# Altium PCB CSMSCMP.PcbDoc
Units mm, origin at the board's own origin, x right, y up, seen from the top; angles counter-clockwise.
Board outline 60 x 100 mm, 2 copper layers (Top Layer, Bottom Layer); 23 components, 14 nets, 71 pads, 590 vias.
Unrouted connection lines stored in the file: 6.
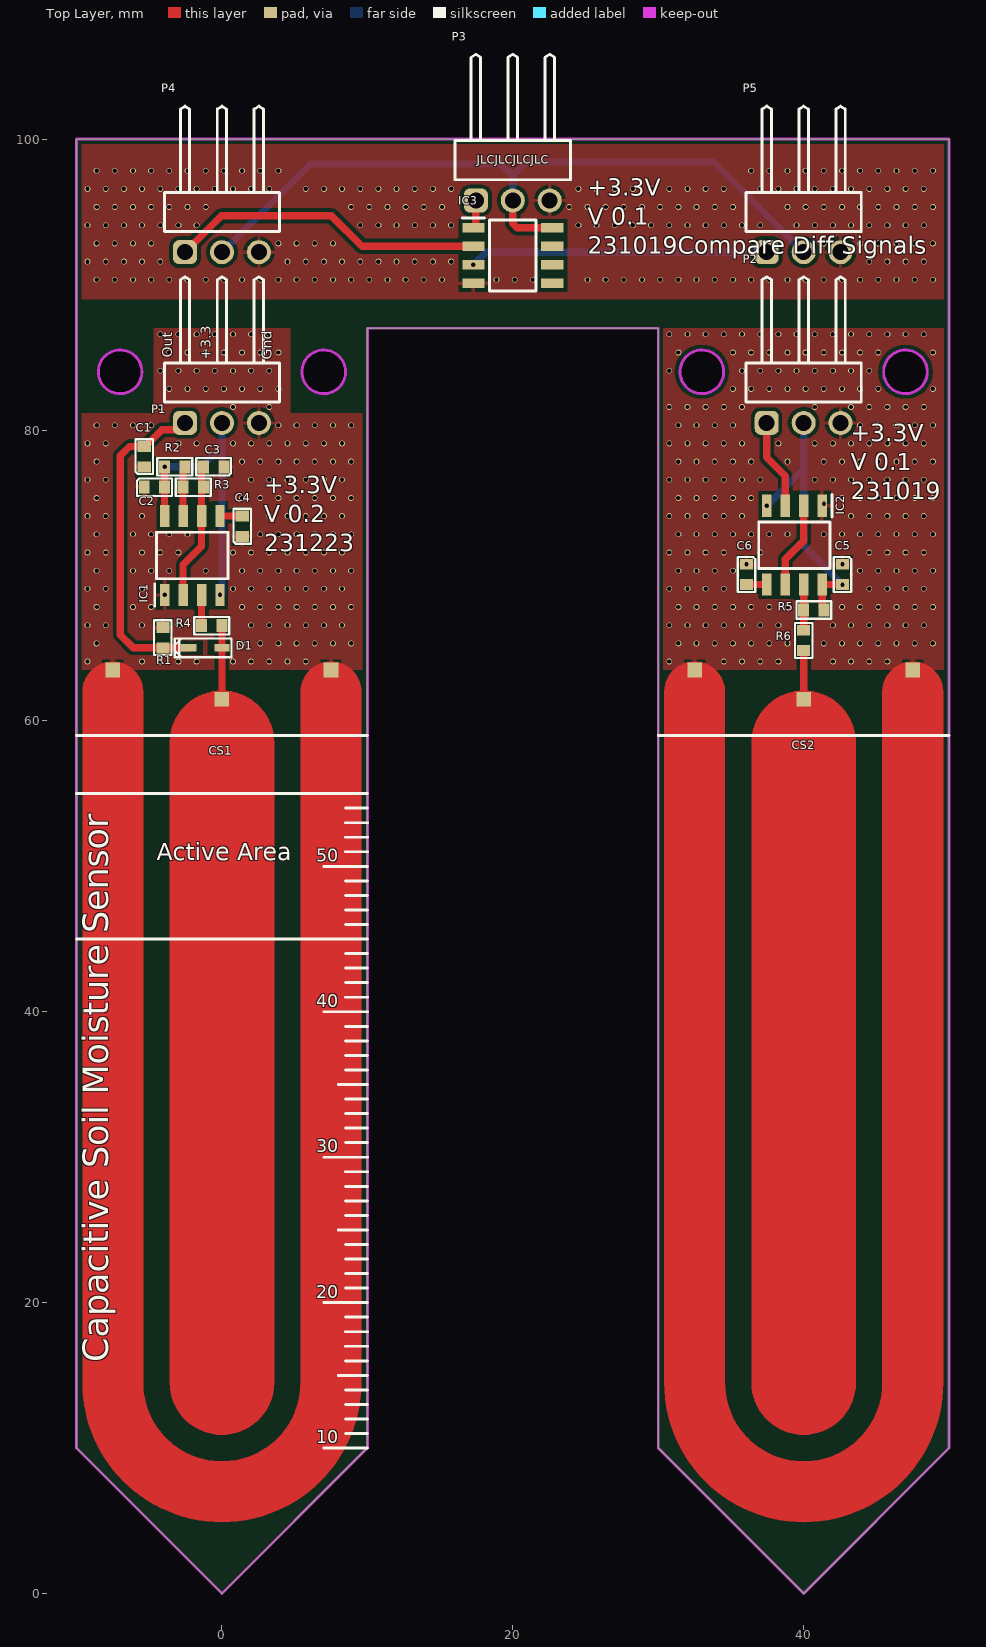
[diagram p0: Top Layer view]
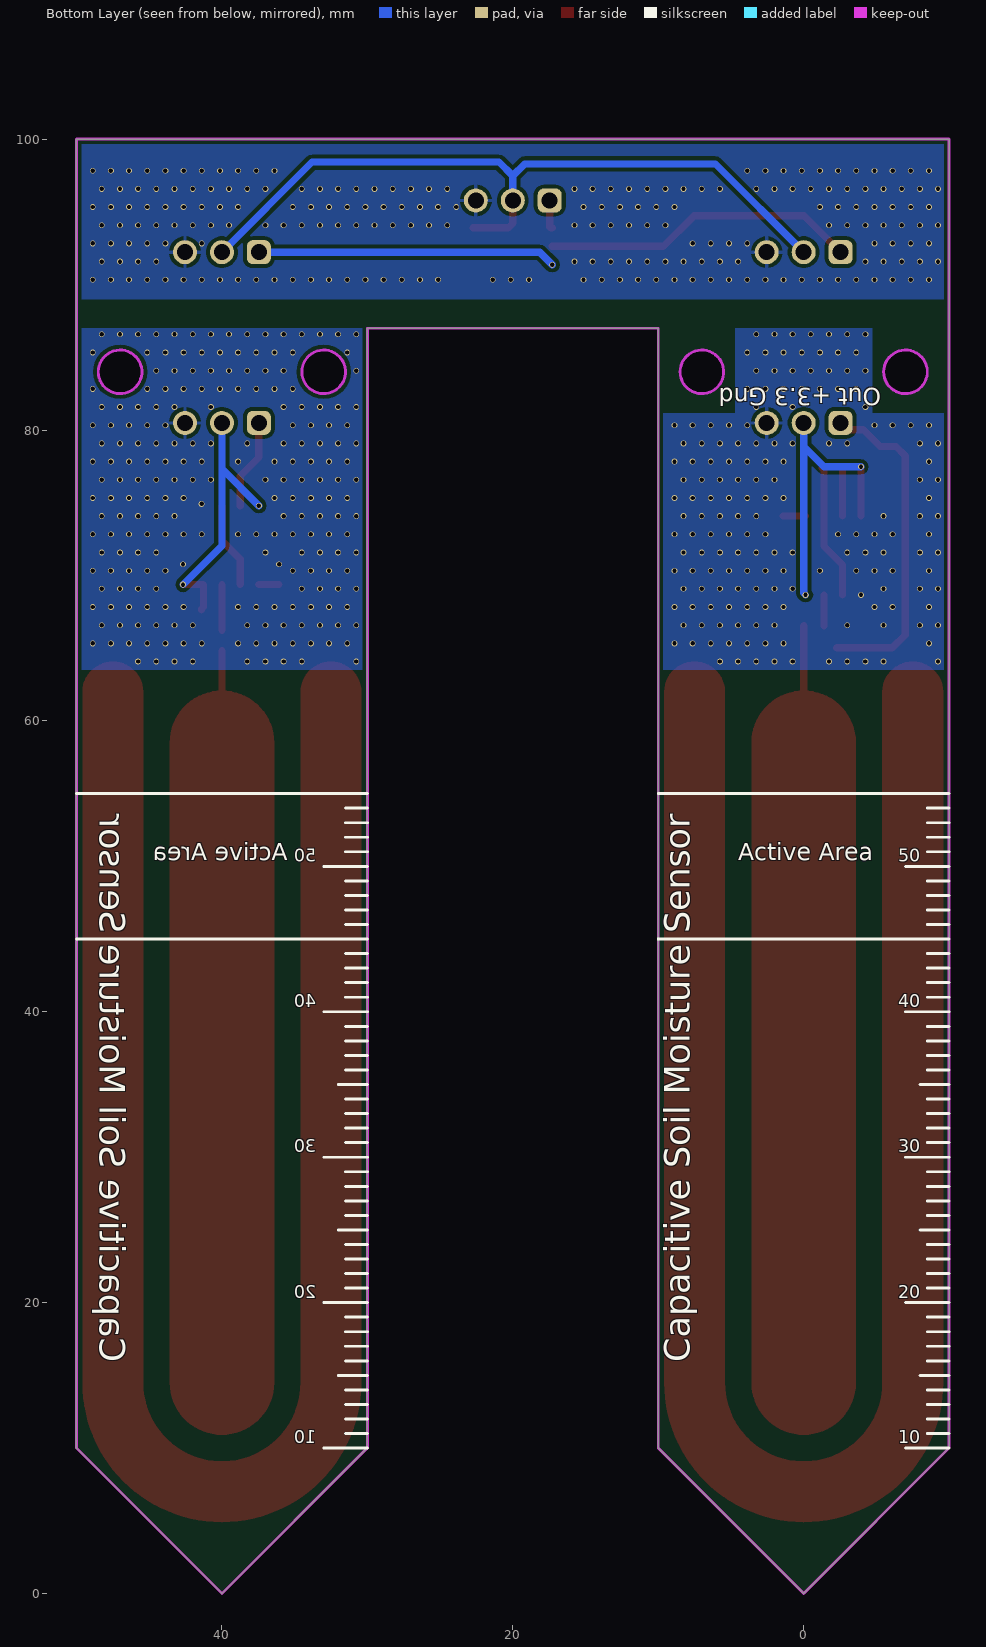
[diagram p1: Bottom Layer view, seen from below]
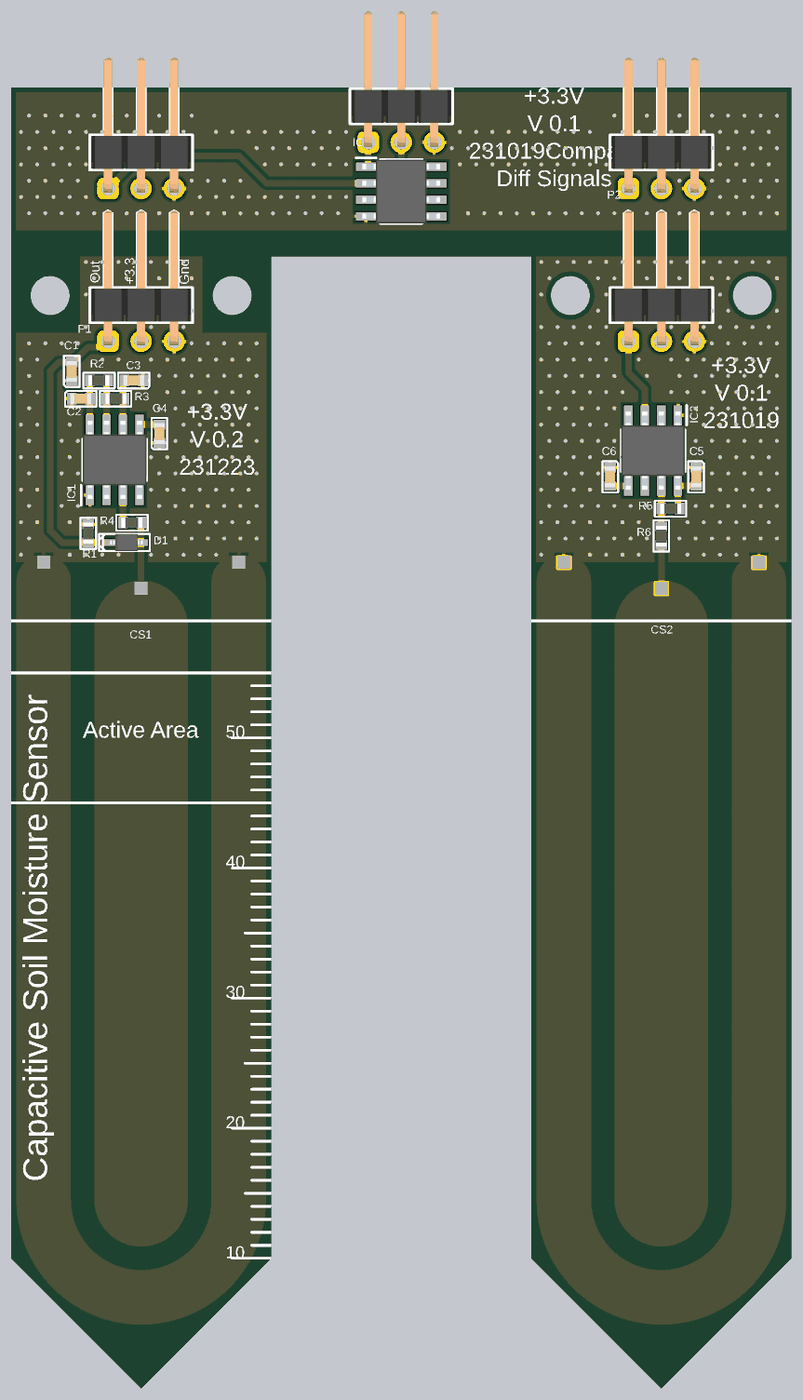
[diagram p2: 3D render of the assembled board from above, using the file's embedded part models]

## Layer stack, top to bottom
Top Solder: solder mask 0.0102, Solder Resist, Dk 3.5
Top Layer: signal copper 0.0356
Dielectric 1: dielectric 0.32, FR-4, Dk 4.8
Bottom Layer: signal copper 0.0356
Bottom Solder: solder mask 0.0102, Solder Resist, Dk 3.5

## Board outline
0,0 -10,10 -10,100 50,100 50,10 40,0 30,10 30,87 10,87 10,10
cut-out: 47,82.5 cw(c47,84) 45.5,84 cw(c47,84) 47,85.5 cw(c47,84) 48.5,84 cw(c47,84)
cut-out: 33,82.5 cw(c33,84) 31.5,84 cw(c33,84) 33,85.5 cw(c33,84) 34.5,84 cw(c33,84)
cut-out: 7,82.5 cw(c7,84) 5.5,84 cw(c7,84) 7,85.5 cw(c7,84) 8.5,84 cw(c7,84)
cut-out: -7,82.5 cw(c-7,84) -8.5,84 cw(c-7,84) -7,85.5 cw(c-7,84) -5.5,84 cw(c-7,84)

## Design rules (kind name [scope] priority, off if disabled: settings)
Clearance [All] p1: gap=0.254 ignorepadtopadclearanceinfootprint=FALSE except(0: Arc-Hole Track-Hole SMDPad-Hole THPad-Hole Via-Hole Fill-Hole Poly-Hole Region-Hole Text-Hole)
PolygonConnect [All] p1: thpad.connectstyle=Relief thpad.reliefconductorwidth=0.254 thpad.reliefentries=4 thpad.polygonreliefangle="90 Angle" thpad.airgapwidth=0.254 smdpad.connectstyle=Relief smdpad.reliefconductorwidth=0.254 smdpad.reliefentries=4 smdpad.polygonreliefangle="90 Angle" smdpad.airgapwidth=0.254 via.connectstyle=Direct via.reliefconductorwidth=0.254 via.reliefentries=4 via.polygonreliefangle="90 Angle" via.airgapwidth=0.254
RoutingVias [All] p1: holewidth=0.3 width=0.4 viastyle="Through Hole" minholewidth=0.3 minwidth=0.4 maxholewidth=0.711 maxwidth=1.27
SolderMaskExpansion [All] p1: expansion=0.102 istentingtop=FALSE
UnRoutedNet [All] p1: checkbadconnections=TRUE
Width [All] p1: maxlimit=1 minlimit=0.254 preferedwidth=0.3 minimp=50.000000 maximp=50.000000 favimp=50.000000
29 further rules are at their usual default settings.

## Classes and differential pairs
component class CSMSF: C5 C6 CS2 IC2 P2 R5 R6
component class CMP: IC3 P3 P4 P5
component class CSMS: C1 C2 C3 C4 CS1 D1 IC1 P1 R1 R2 R3 R4

## Components (designator, comment, footprint, x,y, rotation, side; value= is the part's Value field where it differs from the comment)
C1 "CL10B105KA8NNNC" "0603 CAP" -5.34,78.17 r90 top value="1uF 25VDC"
C2 "CL10B104KB8NNNC" "0603 CAP" -4.64,76.073 r0 top value="100nF 50VDC"
C3 "CL10B471KB8NNNC" "0603 CAP" -0.57,77.47 r180 top value="470pF 50VDC"
C4 "CC0603KRX7R9BB103" "0603 CAP" 1.397,73.386 r90 top value="10nF 50VDC"
C5 "CL10B104KB8NNNC" "0603 CAP" 42.672,70.071 r270 top value="100nF 50VDC"
C6 "CC0603KRX7R9BB103" "0603 CAP" 36.068,70.071 r270 top value="10nF 50VDC"
CS1 "Sens" SENS 0,34.5 r0 top
CS2 "Sens" Sens 40,34.5 r0 top
D1 "1N4148WS-E3-08" SOD2513X110N -1.138,65.024 r0 top
IC1 "TLC555CDR" SOIC127P600X175-8N -2.035,71.374 r90 top
IC2 "TLC555CDR" SOIC127P600X175-8N 39.365,72.083 r270 top
IC3 "LM393DG" SOIC127P600X175-8N 20,92 r0 top
P1 "61300311021" 61300311021 0,83.26 r180 top
P2 "61300311021" 61300311021 40,83.26 r180 top
P3 "61300311021" 61300311021 20,98.552 r180 top
P4 "61300311021" 61300311021 0,95 r180 top
P5 "61300311021" 61300311021 40,95 r180 top
R1 "0603SAF1004T5E" "0603 RES" -4.064,65.724 r90 top value="1M %1"
R2 "0603SAF3300T5E" "0603 RES" -3.24,77.47 r180 top value="330R %1"
R3 "0603SAF1601T5E" "0603 RES" -1.97,76.073 r0 top value="1.6K %1"
R4 "0603SAF1002T5E" "0603 RES" -0.7,66.548 r180 top value="10K %1"
R5 "0603SAF1002T5E" "0603 RES" 40.7,67.622 r0 top value="10K %1"
R6 "0603SAF1004T5E" "0603 RES" 40,65.532 r270 top value="1M %1"

## Footprints (in the part's own frame and the unit in brackets; to place one, negate y for a bottom-side part, rotate by r counter-clockwise, add the part's x,y. Pads: shape width x height; smd on the part's side, far side on the other; paste and mask are expansions set on the pad)
"0603 CAP" [mm]
  rect 0.75x0.9 smd: 1(-0.7,0) 2(0.7,0)
  silkscreen extent -1.2,-0.6 1.2,0.6, body extent -0.8,-0.4 0.8,0.4, height 0.8
"0603 RES" [mm]
  rect 0.75x0.9 smd: 1(-0.7,0) 2(0.7,0)
  silkscreen extent -1.2,-0.6 1.2,0.6, body extent -0.77,-0.4 0.83,0.4, height 0.45
61300311021 [mm] "Pin Header, pitch 2.54 mm, THT, Angled, single row, 3p"
  rrect50% 1.65x1.65 hole 1.1: 1(2.54,2.77)
  round 1.65 hole 1.1: 2(0,2.77) 3(-2.54,2.77)
  silkscreen extent -3.96,-7.27 3.96,1.35, body extent -3.81,-7.27 3.81,3.09, height 2.58
SENS [mm]
  rect 1x1 smd mask+0.102: 1(0,27) 2(-7.5,29) 2(7.5,29)
  Top Layer region: -3.5,-20 -3.153,-21.519 -2.182,-22.736 -0.779,-23.412 0.779,-23.412 2.182,-22.736 3.153,-21.519 3.5,-20 3.5,-20 3.5,24 3.153,25.519 2.182,26.736 0.779,27.412 -0.779,27.412 -2.182,26.736 -3.153,25.519 -3.5,24 -3.5,24
  Top Layer region: -9.5,-20 -9.5,27.5 -9.302,28.368 -8.747,29.064 -7.945,29.45 -7.055,29.45 -6.253,29.064 -5.698,28.368 -5.5,27.5 -5.5,27.5 -5.5,-20 -4.955,-22.386 -3.429,-24.3 -1.224,-25.362 1.224,-25.362 3.429,-24.3 4.955,-22.386 5.5,-20 5.5,-20 5.5,27.5 5.698,28.368 6.253,29.064 7.055,29.45 7.945,29.45 8.747,29.064 9.302,28.368 9.5,27.5 9.5,27.5 9.5,-20 8.559,-24.122 5.923,-27.427 2.114,-29.262 -2.114,-29.262 -5.923,-27.427 -8.559,-24.122 -9.5,-20
  Top Layer lines w0.2: -9.5,-20 ccw(c0,-20) 9.5,-20 9.5,27.5 ccw(c7.5,27.5) 5.5,27.5 5.5,-20 cw(c0,-20) -5.5,-20 -5.5,27.5 ccw(c-7.5,27.5) -9.5,27.5 -9.5,-20 ; -3.5,-20 ccw(c0,-20) 3.5,-20 3.5,24 ccw(c0,24) 0,27.5 ccw(c0,24) -3.5,24 -3.5,-20
Sens [mm]
  rect 1x1 smd: 1(0,27) 2(-7.5,29) 2(7.5,29)
  Top Layer region: -3.5,-20 -3.153,-21.519 -2.182,-22.736 -0.779,-23.412 0.779,-23.412 2.182,-22.736 3.153,-21.519 3.5,-20 3.5,-20 3.5,24 3.153,25.519 2.182,26.736 0.779,27.412 -0.779,27.412 -2.182,26.736 -3.153,25.519 -3.5,24 -3.5,24
  Top Layer region: -9.5,-20 -9.5,27.5 -9.302,28.368 -8.747,29.064 -7.945,29.45 -7.055,29.45 -6.253,29.064 -5.698,28.368 -5.5,27.5 -5.5,27.5 -5.5,-20 -4.955,-22.386 -3.429,-24.3 -1.224,-25.362 1.224,-25.362 3.429,-24.3 4.955,-22.386 5.5,-20 5.5,-20 5.5,27.5 5.698,28.368 6.253,29.064 7.055,29.45 7.945,29.45 8.747,29.064 9.302,28.368 9.5,27.5 9.5,27.5 9.5,-20 8.559,-24.122 5.923,-27.427 2.114,-29.262 -2.114,-29.262 -5.923,-27.427 -8.559,-24.122 -9.5,-20
  Top Layer lines w0.2: -9.5,-20 ccw(c0,-20) 9.5,-20 9.5,27.5 ccw(c7.5,27.5) 5.5,27.5 5.5,-20 cw(c0,-20) -5.5,-20 -5.5,27.5 ccw(c-7.5,27.5) -9.5,27.5 -9.5,-20 ; -3.5,-20 ccw(c0,-20) 3.5,-20 3.5,24 ccw(c0,24) 0,27.5 ccw(c0,24) -3.5,24 -3.5,-20
SOD2513X110N [mm]
  rect 1.05x0.5 smd: 1(-1.138,0) 2(1.138,0)
  silkscreen extent -2.1,-0.65 1.8,0.65, body extent -1.25,-0.65 1.25,0.65, height 1.1
SOIC127P600X175-8N [mm]
  rect 1.525x0.65 smd: 1(-2.712,1.905) 2(-2.712,0.635) 3(-2.712,-0.635) 4(-2.712,-1.905) 5(2.712,-1.905) 6(2.712,-0.635) 7(2.712,0.635) 8(2.712,1.905)
  silkscreen extent -3.47,-2.45 1.6,2.58, body extent -3,-2.45 3,2.45, height 1.75

## Part data
C1: "1uF 25VDC ±10% X7R MLCC 0603", Ozdisan Price/Stock=https://ozdisan.com/Product/Detail/522144/CL10A106MO8NQNC, Supplier 1=Ozdisan, Supplier 2=Digi-Key, Supplier Part Number 1=CL10B105KA8NNNC, Supplier Part Number 2=1276-1184-1-ND
C2 C5: "100nF 50VDC ±10% X7R MLCC 0603", Ozdisan Price/Stock=https://ozdisan.com/Product/Detail/522144/CL10A106MO8NQNC, Supplier 1="Arrow Electronics", Supplier Part Number 1=CL10B104KB8NNNC
C3: "470pF 50VDC ±10% X7R MLCC 0603", Supplier Part Number 1=187-CL10B471KB8NNNC, Ozdisan Price/Stock=https://ozdisan.com/Product/Detail/522144/CL10A106MO8NQNC, Supplier 1=Mouser
C4 C6: "10nF, 50 V, ± 10%, X7R, 0603, Multilayer Ceramic Capacitor,", Supplier Part Number 1=311-1085-1-ND, Ozdisan Price/Stock=https://ozdisan.com/Product/Detail/522144/CL10A106MO8NQNC, Supplier 1=Digi-Key
CS1 CS2: "Pcb Sens"
D1: "Diode", Manufacturer_Name=Vishay, Mouser Part Number=78-1N4148WS-E3-08, Arrow Part Number=1N4148WS-E3-08, Arrow Price/Stock=https://www.arrow.com/en/products/1n4148ws-e3-08/vishay?region=europe, Datasheet Link=https://datasheet.datasheetarchive.com/originals/distributors/Datasheets-DGA23/1390442.pdf, Height=1.15mm, Manufacturer_Part_Number=1N4148WS-E3-08, Mouser Price/Stock=https://www.mouser.co.uk/ProductDetail/Vishay-Semiconductors/1N4148WS-E3-08?qs=bTzheeSci6R8fv1OBRENhQ%3D%3D, Supplier 1=Mouser, Supplier Part Number 1=78-1N4148WS-E3-08
IC1 IC2: "555 Astable 2.1-MHz, 250-µA, Low-Power Timer 8-SOIC 0 to 70", Manufacturer_Name="Texas Instruments", Mouser Part Number=595-TLC555CDR, Arrow Part Number=TLC555CDR, Arrow Price/Stock=https://www.arrow.com/en/products/tlc555cdr/texas-instruments?region=nac, Datasheet Link=https://www.ti.com/lit/ds/symlink/tlc555.pdf?ts=1599218356509&ref_url=https%253A%252F%252Fwww.ti.com%252Fstore%252Fti%252Fen%252Fp%252Fproduct%252F%253Fp%253DTLC555CDR%2526keyMatch%253DTLC555CDR%2526tisearch%253DSearch-EN-everything%2526usecase%253DOPN, Height=1.75mm, Manufacturer_Part_Number=TLC555CDR, Mouser Price/Stock=https://www.mouser.co.uk/ProductDetail/Texas-Instruments/TLC555CDR?qs=gb35HGp1gQImgWgRW%252BGYaw%3D%3D, Supplier 1=Mouser, Supplier Part Number 1=595-TLC555CDR
IC3: "Integrated Circuit", Manufacturer_Name=onsemi, Mouser Part Number=863-LM393DG, Arrow Part Number=LM393DG, Arrow Price/Stock=https://www.arrow.com/en/products/lm393dg/on-semiconductor?region=nac, Datasheet Link=https://www.onsemi.com/pub/Collateral/LM393-D.PDF, Height=1.75mm, Manufacturer_Part_Number=LM393DG, Mouser Price/Stock=https://www.mouser.co.uk/ProductDetail/onsemi/LM393DG?qs=2OtswVQKCOHzXsheSqC0ow%3D%3D
P1 P2 P3 P4 P5: "WR-PHD Pin Header, THT, Angled, pitch 2.54mm, 1 Row, 3P", Contact Resistance=20mΩ, Manufacturer="Wurth Elektronik", Operating Temperature Max=105°C, Operating Temperature Min=-40°C, Rated Current=3A, Supplier Part Number 1=732-5336-ND, Withstanding Voltage=500V, Working Voltage=250V, Category="Board-to-Board Connectors", ComponentLink1Description="Website Link", ComponentLink1URL=https://www.we-online.com/redexpert/article/61300311021?ad, ComponentLink2Description="Datasheet Link", ComponentLink2URL=https://www.we-online.com/redexpert/spec/61300311021?ad, Gender="Pin Header", Manufacturer Part Number=61300311021, Match Code=WR-PHD, Mount="Through Hole", Number of Pins=3, Number of Rows=1, Orientation=Angled, Packaging=Bag, Pitch=2.54mm, Supplier 1=Digi-Key
R1 R6: "1M Ohms 1% 1/10W-S 100PPM RES 0603", Supplier Part Number 1=79M5904, Ozdisan Price/Stock=https://ozdisan.com/Product/Detail/522144/CL10A106MO8NQNC, Supplier 1=Newark
R2: "330R Ohms 1% 1/10W-S 100PPM RES 0603", Supplier Part Number 1=603-RC0603FR-07330RL, Ozdisan Price/Stock=https://ozdisan.com/Product/Detail/522144/CL10A106MO8NQNC, Supplier 1=Mouser
R3: "1.6K Ohms 1% 1/10W-S 100PPM RES 0603", Supplier Part Number 1=39P9958, Ozdisan Price/Stock=https://ozdisan.com/Product/Detail/522144/CL10A106MO8NQNC, Supplier 1=Avnet
R4 R5: "10K Ohms 1% 1/10W-S 100PPM RES 0603", Supplier Part Number 1=1632392, Ozdisan Price/Stock=https://ozdisan.com/Product/Detail/522144/CL10A106MO8NQNC, Supplier 1=Farnell

## Via types
v1: diameter 0.4, hole 0.3, Top Layer to Bottom Layer, tented both sides, 590 vias

## Nets (pads, with @x,y where several pads share a name; then routed paths per layer and width w, separated by ;. In a path a pad name is that pad's centre, name@x,y a point inside that pad or via, vN(x,y) a via of type N, cw(c..) or ccw(c..) an arc to the next point about the centre after c; other vN are vias at no path point)
+3.3: C2.2 C5.2 IC1.4 IC1.8 IC2.4 IC2.8 IC3.8 P1.2 P2.2 P3.2 P4.2 P5.2 R2.2 R5.2 | length 90.7
  Top Layer w0.5: IC1.8 C2.2 v1(-3.94,77.47) ; P3.2 20,94.198 20.293,93.905 IC3.8 ; R5.2 41.4,67.697 41.27,67.827 IC2.8 v1(42.672,69.371)
  Bottom Layer w0.5: v1(-3.94,77.47) -1.397,77.47 0,78.867 ; v1(-0.13,68.662) 0,68.792 0,78.867 ; P1.2 0,78.867 ; P4.2 6.068,98.298 19.177,98.298 20,97.475 ; P3.2 20,97.475 ; v1(37.46,74.795) 40,77.335 ; P2.2 40,77.335 ; P5.2 33.805,98.425 20.95,98.425 20,97.475 ; v1(42.672,69.371) 40,72.043 40,77.335
CmpSensOut: IC3.1 P3.1 | length 2
  Top Layer w0.5: IC3.1 17.385,93.905 17.46,93.98 P3.1
GND: C1.1 C2.1 C3.1 C4.1 C5.1 C6.1 CS1.2 CS2.2 IC1.1 IC2.1 IC3.4 P1.3 P2.3 P3.3 P4.3 P5.3 R1.2
  other v1: -9.241,64.08 -5.491,64.08 -4.241,64.08 -2.991,64.08 -1.741,64.08 0.759,64.08 2.009,64.08 3.259,64.08 4.509,64.08 5.759,64.08 30.759,64.08 34.509,64.08 35.759,64.08 37.009,64.08 38.259,64.08 42.009,64.08 43.259,64.08 44.509,64.08 45.759,64.08 -8.616,65.33 1.384,65.33 2.634,65.33 3.884,65.33 5.134,65.33 6.384,65.33 7.634,65.33 8.884,65.33 31.384,65.33 32.634,65.33 33.884,65.33 35.134,65.33 36.384,65.33 37.634,65.33 38.884,65.33 41.384,65.33 42.634,65.33 43.884,65.33 45.134,65.33 46.384,65.33 47.634,65.33 48.884,65.33 -9.241,66.58 -7.991,66.58 -5.491,66.58 -2.991,66.58 2.009,66.58 3.259,66.58 4.509,66.58 5.759,66.58 7.009,66.58 8.259,66.58 30.759,66.58 32.009,66.58 33.259,66.58 34.509,66.58 35.759,66.58 37.009,66.58 38.259,66.58 42.009,66.58 43.259,66.58 44.509,66.58 45.759,66.58 47.009,66.58 48.259,66.58 -8.616,67.83 -6.116,67.83 -4.866,67.83 1.384,67.83 2.634,67.83 3.884,67.83 5.134,67.83 6.384,67.83 7.634,67.83 8.884,67.83 31.384,67.83 32.634,67.83 33.884,67.83 35.134,67.83 36.384,67.83 37.634,67.83 38.884,67.83 42.634,67.83 43.884,67.83 45.134,67.83 46.384,67.83 47.634,67.83 48.884,67.83 -3.94,68.662 -9.241,69.08 -7.991,69.08 -5.491,69.08 0.759,69.08 2.009,69.08 3.259,69.08 4.509,69.08 5.759,69.08 7.009,69.08 8.259,69.08 30.759,69.08 32.009,69.08 33.259,69.08 34.509,69.08 44.509,69.08 45.759,69.08 47.009,69.08 48.259,69.08 -8.616,70.33 -6.116,70.33 -4.866,70.33 -3.616,70.33 -1.116,70.33 1.384,70.33 2.634,70.33 3.884,70.33 5.134,70.33 6.384,70.33 7.634,70.33 8.884,70.33 31.384,70.33 32.634,70.33 33.884,70.33 35.134,70.33 43.884,70.33 45.134,70.33 46.384,70.33 47.634,70.33 48.884,70.33 36.068,70.771 42.672,70.771 -9.241,71.58 -7.991,71.58 -5.491,71.58 -4.241,71.58 -2.991,71.58 0.759,71.58 2.009,71.58 3.259,71.58 4.509,71.58 5.759,71.58 7.009,71.58 8.259,71.58 30.759,71.58 32.009,71.58 33.259,71.58 34.509,71.58 37.009,71.58 44.509,71.58 45.759,71.58 47.009,71.58 48.259,71.58 -8.616,72.83 -6.116,72.83 -4.866,72.83 -3.616,72.83 -2.366,72.83 2.634,72.83 3.884,72.83 5.134,72.83 6.384,72.83 7.634,72.83 8.884,72.83 31.384,72.83 32.634,72.83 33.884,72.83 35.134,72.83 36.384,72.83 37.634,72.83 38.884,72.83 41.384,72.83 42.634,72.83 43.884,72.83 45.134,72.83 46.384,72.83 47.634,72.83 48.884,72.83 -9.241,74.08 -7.991,74.08 -5.491,74.08 3.259,74.08 4.509,74.08 5.759,74.08 7.009,74.08 8.259,74.08 30.759,74.08 32.009,74.08 33.259,74.08 34.509,74.08 35.759,74.08 43.259,74.08 44.509,74.08 45.759,74.08 47.009,74.08 48.259,74.08 41.397,74.922 -8.616,75.33 1.384,75.33 2.634,75.33 3.884,75.33 5.134,75.33 6.384,75.33 7.634,75.33 8.884,75.33 31.384,75.33 32.634,75.33 33.884,75.33 35.134,75.33 36.384,75.33 42.634,75.33 43.884,75.33 45.134,75.33 46.384,75.33 47.634,75.33 48.884,75.33 -9.241,76.58 -7.991,76.58 2.009,76.58 3.259,76.58 4.509,76.58 5.759,76.58 7.009,76.58 8.259,76.58 30.759,76.58 32.009,76.58 33.259,76.58 34.509,76.58 35.759,76.58 37.009,76.58 40.759,76.58 42.009,76.58 43.259,76.58 44.509,76.58 45.759,76.58 47.009,76.58 48.259,76.58 -8.616,77.83 1.384,77.83 2.634,77.83 3.884,77.83 5.134,77.83 6.384,77.83 7.634,77.83 8.884,77.83 31.384,77.83 32.634,77.83 33.884,77.83 35.134,77.83 36.384,77.83 38.884,77.83 41.384,77.83 42.634,77.83 43.884,77.83 45.134,77.83 46.384,77.83 47.634,77.83 48.884,77.83 -9.241,79.08 -7.991,79.08 -2.991,79.08 -1.741,79.08 0.759,79.08 2.009,79.08 3.259,79.08 4.509,79.08 5.759,79.08 7.009,79.08 8.259,79.08 30.759,79.08 32.009,79.08 33.259,79.08 34.509,79.08 35.759,79.08 38.259,79.08 40.759,79.08 42.009,79.08 43.259,79.08 44.509,79.08 45.759,79.08 47.009,79.08 48.259,79.08 -8.616,80.33 -7.366,80.33 -6.116,80.33 -4.866,80.33 3.884,80.33 5.134,80.33 6.384,80.33 7.634,80.33 8.884,80.33 31.384,80.33 32.634,80.33 33.884,80.33 35.134,80.33 43.884,80.33 45.134,80.33 46.384,80.33 47.634,80.33 48.884,80.33 -4.241,81.58 0.759,81.58 3.259,81.58 30.759,81.58 32.009,81.58 33.259,81.58 34.509,81.58 35.759,81.58 40.759,81.58 43.259,81.58 44.509,81.58 45.759,81.58 47.009,81.58 48.259,81.58 -3.616,82.83 -2.366,82.83 -1.116,82.83 0.134,82.83 1.384,82.83 2.634,82.83 3.884,82.83 35.134,82.83 36.384,82.83 37.634,82.83 38.884,82.83 40.134,82.83 41.384,82.83 42.634,82.83 43.884,82.83 45.134,82.83 48.884,82.83 -4.241,84.08 -2.991,84.08 -1.741,84.08 -0.491,84.08 0.759,84.08 2.009,84.08 3.259,84.08 30.759,84.08 35.759,84.08 37.009,84.08 38.259,84.08 39.509,84.08 40.759,84.08 42.009,84.08 43.259,84.08 44.509,84.08 -3.616,85.33 -2.366,85.33 -1.116,85.33 0.134,85.33 1.384,85.33 2.634,85.33 3.884,85.33 31.384,85.33 35.134,85.33 36.384,85.33 37.634,85.33 38.884,85.33 40.134,85.33 41.384,85.33 42.634,85.33 43.884,85.33 45.134,85.33 48.884,85.33 -4.241,86.58 -2.991,86.58 -1.741,86.58 -0.491,86.58 0.759,86.58 2.009,86.58 3.259,86.58 30.759,86.58 32.009,86.58 33.259,86.58 34.509,86.58 35.759,86.58 37.009,86.58 38.259,86.58 39.509,86.58 40.759,86.58 42.009,86.58 43.259,86.58 44.509,86.58 45.759,86.58 47.009,86.58 48.259,86.58 -8.616,90.33 -7.366,90.33 -6.116,90.33 -4.866,90.33 -3.616,90.33 -2.366,90.33 -1.116,90.33 0.134,90.33 1.384,90.33 2.634,90.33 3.884,90.33 5.134,90.33 6.384,90.33 7.634,90.33 8.884,90.33 10.134,90.33 11.384,90.33 12.634,90.33 13.884,90.33 15.134,90.33 18.884,90.33 20.134,90.33 21.384,90.33 25.134,90.33 26.384,90.33 27.634,90.33 28.884,90.33 30.134,90.33 31.384,90.33 32.634,90.33 33.884,90.33 35.134,90.33 36.384,90.33 37.634,90.33 38.884,90.33 40.134,90.33 41.384,90.33 42.634,90.33 43.884,90.33 45.134,90.33 46.384,90.33 47.634,90.33 48.884,90.33 -9.241,91.58 -7.991,91.58 -6.741,91.58 -5.491,91.58 -4.241,91.58 4.509,91.58 5.759,91.58 7.009,91.58 8.259,91.58 9.509,91.58 10.759,91.58 12.009,91.58 13.259,91.58 14.509,91.58 15.759,91.58 44.509,91.58 45.759,91.58 47.009,91.58 48.259,91.58 -8.616,92.83 -7.366,92.83 -6.116,92.83 -4.866,92.83 3.884,92.83 5.134,92.83 6.384,92.83 7.634,92.83 41.384,92.83 43.884,92.83 45.134,92.83 46.384,92.83 47.634,92.83 48.884,92.83 -9.241,94.08 -7.991,94.08 -6.741,94.08 -5.491,94.08 -4.241,94.08 -2.991,94.08 -1.741,94.08 9.509,94.08 10.759,94.08 12.009,94.08 13.259,94.08 14.509,94.08 15.759,94.08 24.509,94.08 25.759,94.08 27.009,94.08 28.259,94.08 29.509,94.08 30.759,94.08 32.009,94.08 33.259,94.08 34.509,94.08 35.759,94.08 37.009,94.08 39.509,94.08 40.759,94.08 42.009,94.08 43.259,94.08 44.509,94.08 45.759,94.08 47.009,94.08 48.259,94.08 -8.616,95.33 -7.366,95.33 -6.116,95.33 -4.866,95.33 -3.616,95.33 -2.366,95.33 -1.116,95.33 8.884,95.33 10.134,95.33 11.384,95.33 12.634,95.33 13.884,95.33 15.134,95.33 23.884,95.33 25.134,95.33 26.384,95.33 27.634,95.33 28.884,95.33 30.134,95.33 31.384,95.33 32.634,95.33 33.884,95.33 35.134,95.33 38.884,95.33 40.134,95.33 41.384,95.33 42.634,95.33 43.884,95.33 45.134,95.33 46.384,95.33 47.634,95.33 48.884,95.33 -9.241,96.58 -7.991,96.58 -6.741,96.58 -5.491,96.58 -4.241,96.58 -2.991,96.58 -1.741,96.58 -0.491,96.58 0.759,96.58 2.009,96.58 3.259,96.58 5.759,96.58 7.009,96.58 8.259,96.58 9.509,96.58 10.759,96.58 12.009,96.58 13.259,96.58 14.509,96.58 15.759,96.58 24.509,96.58 25.759,96.58 27.009,96.58 28.259,96.58 29.509,96.58 30.759,96.58 32.009,96.58 33.259,96.58 34.509,96.58 37.009,96.58 38.259,96.58 39.509,96.58 40.759,96.58 42.009,96.58 43.259,96.58 44.509,96.58 45.759,96.58 47.009,96.58 48.259,96.58 -8.616,97.83 -7.366,97.83 -6.116,97.83 -4.866,97.83 -3.616,97.83 -2.366,97.83 -1.116,97.83 0.134,97.83 1.384,97.83 2.634,97.83 3.884,97.83 36.384,97.83 37.634,97.83 38.884,97.83 40.134,97.83 41.384,97.83 42.634,97.83 43.884,97.83 45.134,97.83 46.384,97.83 47.634,97.83 48.884,97.83
NetC3_2: C3.2 IC1.2 IC1.6 R3.2 | length 9.4
  Top Layer w0.5: IC1.2 -2.67,70.736 -1.4,72.006 IC1.6 -1.4,77.265 -1.27,77.395 C3.2
NetC4_2: C4.2 IC1.5 | length 1.5
  Top Layer w0.5: IC1.5 C4.2
NetC6_2: C6.2 IC2.5 | length 1.4
  Top Layer w0.5: C6.2 IC2.5
NetCS1_1: CS1.1 D1.2 R4.1 | length 5
  Top Layer w0.5: CS1.1 0,62 D1.2 R4.1
NetCS2_1: CS2.1 R6.2 | length 3.3
  Top Layer w0.5: CS2.1 40,62 R6.2
NetIC2_2: IC2.2 IC2.6 | length 6
  Top Layer w0.5: IC2.6 38.73,71.115 40,72.385 IC2.2
NetR2_1: IC1.7 R2.1 R3.1 | length 3.4
  Top Layer w0.5: IC1.7 R3.1 R2.1@-2.67,77.47
NetR4_2: IC1.3 R4.2 | length 2.1
  Top Layer w0.5: R4.2 IC1.3
NetR5_1: IC2.7 R5.1 R6.1 | length 3.1
  Top Layer w0.5: R6.1 R5.1 IC2.7
Sens2Out: IC2.3 IC3.3 P2.1 P5.1 | length 26.8
  Top Layer w0.5: P2.1 37.46,78.11 38.73,76.84 IC2.3
  Bottom Layer w0.5: v1(17.288,91.365) 18.153,92.23 P5.1
SensOut: C1.2 D1.1 IC3.2 P1.1 P4.1 R1.1 | length 44.5
  Top Layer w0.5: P1.1 -3.01,80.02 -4.115,80.02 -5.265,78.87 C1.2 -6.347,78.87 -6.985,78.232 -6.985,65.913 -6.096,65.024 R1.1 D1.1 ; P4.1 -0.028,94.742 7.525,94.742 9.632,92.635 IC3.2
pads on no net: IC3.5 IC3.6 IC3.7

## Polygon pours and split planes (outlines as drawn)
GND on Bottom Layer "NONET_L-01_P-001" (solid, remove dead copper, pour order 5): 50,100 -10,100 -10,89 50,89
GND on Bottom Layer "NONET_L-01_P-001" (solid, remove dead copper, pour order 4): 30,87 50,87 50,63.5 30,63.5
GND on Bottom Layer "NONET_L-01_P-001" (solid, remove dead copper, pour order 0): -10,87 10,87 10,63.5 -10,63.5
GND on Top Layer "NONET_L-01_P-001" (solid, remove dead copper, pour order 3): 50,100 -10,100 -10,89 50,89
GND on Top Layer "NONET_L-01_P-001" (solid, remove dead copper, pour order 2): 50,87 30,87 30,63.5 50,63.5
GND on Top Layer "NONET_L-01_P-001" (solid, remove dead copper, pour order 1): 10,87 -10,87 -10,63.5 10,63.5

## Keep-outs
Keep-Out Layer:
  circle w0.2: c33,84 r1.5
  circle w0.2: c47,84 r1.5
  circle w0.2: c-7,84 r1.5
  circle w0.2: c7,84 r1.5
  lines w0.2: -10,10 -10,100 50,100 50,10 40,0 30,10 30,87 10,87 10,10 0,0 -10,10

## Other copper
Top Layer:
  pour cut-out: 9.639,87 9.634,86.995 4.699,86.995 4.699,81.153 9.652,81.153
  pour cut-out: -9.639,87 -9.634,86.995 -4.699,86.995 -4.699,81.28 -4.826,81.153 -9.652,81.153
  pour cut-out: 43.307,70.387 43.18,70.26 43.18,69.752 42.164,69.752 42.164,70.387
  pour cut-out: 36.703,70.387 36.576,70.26 36.576,69.752 35.56,69.752 35.56,70.387
  pour cut-out: 39.365,65.216 39.492,65.343 39.492,65.851 40.508,65.851 40.508,65.216
  pour cut-out: -4.324,75.438 -4.451,75.565 -4.959,75.565 -4.959,76.581 -4.324,76.581
  pour cut-out: -4.705,78.486 -4.832,78.359 -4.832,77.851 -5.848,77.851 -5.848,78.486
  pour cut-out: -3.429,66.04 -3.556,65.913 -3.556,65.405 -4.572,65.405 -4.572,66.04
  pour cut-out: -1.27,64.399 -1.387,64.516 -1.895,64.516 -1.895,65.532 -1.27,65.532
  pour cut-out: -1.016,65.659 -0.381,65.659 -0.381,64.516 -1.016,64.516
  pour cut-out: -1.016,67.183 -0.889,67.056 -0.381,67.056 -0.381,66.04 -1.016,66.04
  pour cut-out: 0.762,73.07 0.889,73.197 0.889,73.705 1.905,73.705 1.905,73.07
  pour cut-out: -0.886,78.105 -0.759,77.978 -0.251,77.978 -0.251,76.962 -0.886,76.962
  pour cut-out: -3.556,78.105 -3.429,77.978 -2.921,77.978 -2.921,76.962 -3.556,76.962
Bottom Layer:
  pour cut-out: 9.639,87 9.634,86.995 4.699,86.995 4.699,81.153 9.652,81.153
  pour cut-out: -9.639,87 -9.634,86.995 -4.699,86.995 -4.699,81.153 -9.652,81.153

## Silkscreen, mask and mechanical layers (free items; w line width, h text height)
Top Overlay:
  lines w0.2: -10,45 10,45 ; -10,55 10,55 ; -10,59 10,59 ; 7,10 10,10 ; 7,20 10,20 ; 7,30 10,30 ; 7,40 10,40 ; 7,50 10,50 ; 8,15 10,15 ; 8,25 10,25 ; 8,35 10,35 ; 8.5,11 10,11 ; 8.5,12 10,12 ; 8.5,13 10,13 ; 8.5,14 10,14 ; 8.5,16 10,16 ; 8.5,17 10,17 ; 8.5,18 10,18 ; 8.5,19 10,19 ; 8.5,21 10,21 ; 8.5,22 10,22 ; 8.5,23 10,23 ; 8.5,24 10,24 ; 8.5,26 10,26 ; 8.5,27 10,27 ; 8.5,28 10,28 ; 8.5,29 10,29 ; 8.5,31 10,31 ; 8.5,32 10,32 ; 8.5,33 10,33 ; 8.5,34 10,34 ; 8.5,36 10,36 ; 8.5,37 10,37 ; 8.5,38 10,38 ; 8.5,39 10,39 ; 8.5,41 10,41 ; 8.5,42 10,42 ; 8.5,43 10,43 ; 8.5,44 10,44 ; 8.5,46 10,46 ; 8.5,47 10,47 ; 8.5,48 10,48 ; 8.5,49 10,49 ; 8.5,51 10,51 ; 8.5,52 10,52 ; 8.5,53 10,53 ; 8.5,54 10,54 ; 30,59 50,59
  text "JLCJLCJLCJLC" at 17.526,98.088 h1
  text "+3.3V / V 0.1 / 231019Compare Diff Signals" at 25.157,91.694 h2
  text "Out" at -3.188,84.963 h1.2 r90
  text "+3.3" at -0.522,84.836 h1.2 r90
  text "Gnd" at 3.67,84.836 h1.2 r90
  text "+3.3V / V 0.1 / 231019" at 43.235,74.829 h2
  text "+3.3V / V 0.2 / 231223" at 2.926,71.247 h2
  text "Active Area" at -4.486,50.02 h2
  text "50" at 6.5,50.016 h1.52
  text "40" at 6.5,40.016 h1.52
  text "30" at 6.5,30.018 h1.52
  text "20" at 6.499,20.009 h1.5
  text "Capacitive Soil Moisture Sensor" at -7.239,15.889 h3 r90
  text "10" at 6.5,10.016 h1.5
Bottom Overlay:
  lines w0.2: -10,10 -7,10 ; -10,11 -8.5,11 ; -10,12 -8.5,12 ; -10,13 -8.5,13 ; -10,14 -8.5,14 ; -10,15 -8,15 ; -10,16 -8.5,16 ; -10,17 -8.5,17 ; -10,18 -8.5,18 ; -10,19 -8.5,19 ; -10,20 -7,20 ; -10,21 -8.5,21 ; -10,22 -8.5,22 ; -10,23 -8.5,23 ; -10,24 -8.5,24 ; -10,25 -8,25 ; -10,26 -8.5,26 ; -10,27 -8.5,27 ; -10,28 -8.5,28 ; -10,29 -8.5,29 ; -10,30 -7,30 ; -10,31 -8.5,31 ; -10,32 -8.5,32 ; -10,33 -8.5,33 ; -10,34 -8.5,34 ; -10,35 -8,35 ; -10,36 -8.5,36 ; -10,37 -8.5,37 ; -10,38 -8.5,38 ; -10,39 -8.5,39 ; -10,40 -7,40 ; -10,41 -8.5,41 ; -10,42 -8.5,42 ; -10,43 -8.5,43 ; -10,44 -8.5,44 ; -10,45 10,45 ; -10,46 -8.5,46 ; -10,47 -8.5,47 ; -10,48 -8.5,48 ; -10,49 -8.5,49 ; -10,50 -7,50 ; -10,51 -8.5,51 ; -10,52 -8.5,52 ; -10,53 -8.5,53 ; -10,54 -8.5,54 ; -10,55 10,55 ; 30,10 33,10 ; 30,11 31.5,11 ; 30,12 31.5,12 ; 30,13 31.5,13 ; 30,14 31.5,14 ; 30,15 32,15 ; 30,16 31.5,16 ; 30,17 31.5,17 ; 30,18 31.5,18 ; 30,19 31.5,19 ; 30,20 33,20 ; 30,21 31.5,21 ; 30,22 31.5,22 ; 30,23 31.5,23 ; 30,24 31.5,24 ; 30,25 32,25 ; 30,26 31.5,26 ; 30,27 31.5,27 ; 30,28 31.5,28 ; 30,29 31.5,29 ; 30,30 33,30 ; 30,31 31.5,31 ; 30,32 31.5,32 ; 30,33 31.5,33 ; 30,34 31.5,34 ; 30,35 32,35 ; 30,36 31.5,36 ; 30,37 31.5,37 ; 30,38 31.5,38 ; 30,39 31.5,39 ; 30,40 33,40 ; 30,41 31.5,41 ; 30,42 31.5,42 ; 30,43 31.5,43 ; 30,44 31.5,44 ; 30,45 50,45 ; 30,46 31.5,46 ; 30,47 31.5,47 ; 30,48 31.5,48 ; 30,49 31.5,49 ; 30,50 33,50 ; 30,51 31.5,51 ; 30,52 31.5,52 ; 30,53 31.5,53 ; 30,54 31.5,54 ; 30,55 50,55
  text "Out +3.3 Gnd" at -5.334,83.289 h2 r180
  text "50" at -6.5,50.016 h1.52
  text "Active Area" at 4.486,50.02 h2
  text "50" at 33.5,50.016 h1.52
  text "Active Area" at 35.467,50.02 h2
  text "40" at -6.5,40.016 h1.52
  text "40" at 33.5,40.016 h1.52
  text "30" at -6.5,30.018 h1.52
  text "30" at 33.5,30.018 h1.52
  text "20" at -6.499,20.009 h1.5
  text "20" at 33.499,20.009 h1.5
  text "Capacitive Soil Moisture Sensor" at 7.239,15.889 h3 r270
  text "Capacitive Soil Moisture Sensor" at 48.967,15.889 h3 r90
  text "10" at -6.5,10.016 h1.5
  text "10" at 33.5,10.016 h1.5
Mechanical 1:
  region: 16.692,87.046 16.184,90.348 17.2,90.348
  region: 17.2,80.744 16.184,80.744 16.692,84.046
  region: -10,92.688 -13.302,92.18 -13.302,93.196
  region: -3.698,92.18 -7,92.688 -3.698,93.196
  region: 10.302,90.176 7,90.684 10.302,91.192
  region: -7,90.684 -10.302,90.176 -10.302,91.192
  region: -22.132,10 -22.64,13.302 -21.624,13.302
  region: -21.624,83.5 -22.64,83.5 -22.132,86.802
  region: -21.595,-3.302 -22.611,-3.302 -22.103,0
  region: -22.103,10 -22.611,13.302 -21.595,13.302
  region: -10,99.031 -13.302,98.523 -13.302,99.539
  region: 13.302,98.523 10,99.031 13.302,99.539
  region: -7.307,85.462 -10.126,87.255 -9.457,88.02
  region: -34.881,0 -35.389,3.302 -34.373,3.302
  region: -34.373,83.5 -35.389,83.5 -34.881,86.802
  region: 24.893,60.5 23.877,60.5 24.385,63.802
  region: 24.385,0 23.877,3.302 24.893,3.302
  lines w0.2: -38.056,0 -1.27,0 -25.278,0 ; -37.04,87 -10.254,87 ; -34.881,0 -34.881,39.63 ; -34.881,44.671 -34.881,87 ; -25.307,10 -11.27,10 -25.278,10 ; -22.132,10 -22.132,27.897 ; -22.132,32.937 -22.132,87 ; -22.103,-6.35 -22.103,0 ; -22.103,10 -22.103,16.35 ; -16.35,92.688 -10,92.688 ; -16.35,99.031 -10,99.031 ; -16.257,91.617 -11.559,87.505 -9.806,87.621 ; -13.35,90.684 -7,90.684 ; -10,95.863 -10,88.316 -10,102.206 ; -7,92.688 -0.65,92.688 ; -7,93.859 -7,85.316 -7,95.863 ; 1.27,0 27.56,0 ; 7,85.316 7,93.859 ; 7,90.684 13.35,90.684 ; 8.27,84.046 19.867,84.046 ; 10,88.316 10,102.206 ; 10,99.031 16.35,99.031 ; 11.27,64 27.56,64 ; 11.27,87.046 19.867,87.046 ; 16.692,77.696 16.692,84.046 ; 16.692,87.046 16.692,93.396 ; 24.385,0 24.385,29.333 ; 24.385,34.373 24.385,64
  text "20,00" at -3.051,100.351 h3.17
  text "3,00" at -10.16,96.033 h3.17
  text "14,00" at -0.508,91.715 h3.17
  text "3,00" at -21.082,89.048 h3.17
  text "3,00" at 13.843,84.857 h3.17
  text "87" at -36.322,41.436 h3.17
  text "64" at 22.479,31.022 h3.17
  text "77" at -23.495,29.591 h3.17
  text "10,00" at -27.582,4.025 h3.17